# EAGLE board neojoint-splitter-30mm (EAGLE 6.6.0)
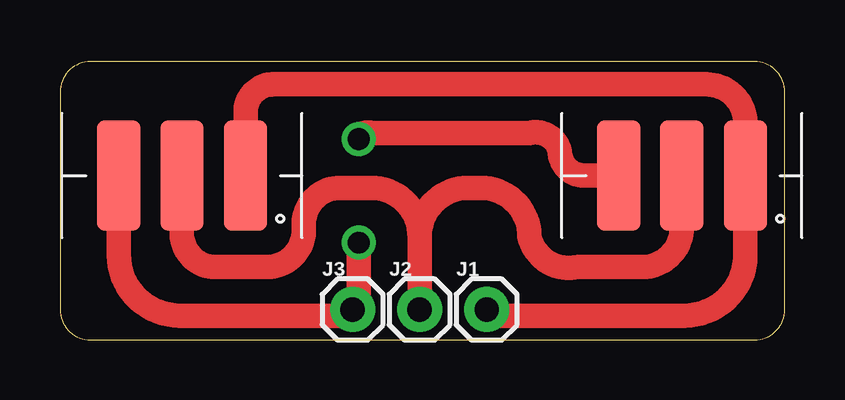
[diagram p0: board, top side]
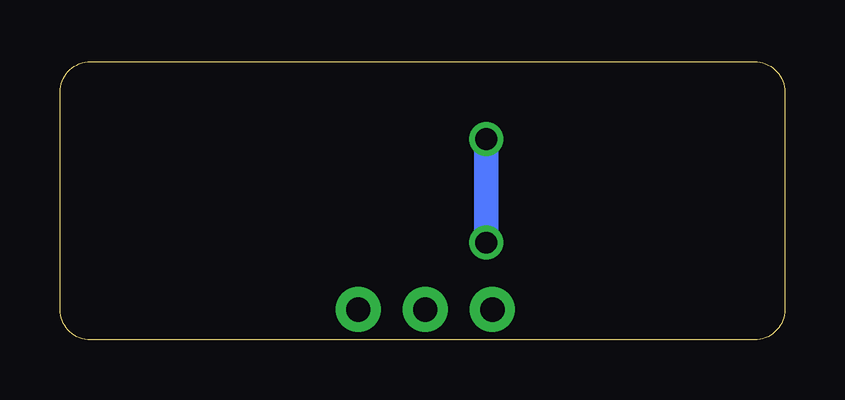
[diagram p1: board, bottom side, seen from below]

Size 30.21 x 11.61 mm. Coordinates in mm from the lower left corner, seen from the top.
Outline: 0,10.34 0,1.27 arc90 1.27,0 28.94,0 arc90 30.21,1.27 30.21,10.34 arc90 28.94,11.61 1.27,11.61 arc90 0,10.34
Copper layers (1*16): Top 0.035mm / dielectric 1.5mm / Bottom 0.035mm
Design rules "OthermillDRC_1_32_v2": minimum track width 8mil, minimum drill 0.8mm, track to track 0.794003125mm, track to pad 0.794003125mm, pad to pad 0.794003125mm, via to via 0.794003125mm, smd to smd 0mil, copper to edge 0mil, drill to drill 1mil, minimum pad ring 10mil, minimum via ring 10mil, stop-mask expansion 1mil, vias tented up to drill 30mil, thermal gap 10mil

## Footprints (pad centres in the part's own frame; a part is rotated, then mirrored left to right if it is on the bottom)
1X01 = drill 1.016 pad 1.88: 1 0,0
LEDSTRIP-3P = smd 4.6 x 1.8: A 0,-2.65; B 0,0; C 0,2.63

## Placement (x,y rotation side)
J1  [1X01]  17.78,1.27 0 top
J2  [1X01]  14.99,1.27 0 top
J3  [1X01]  12.19,1.27 0 top
U$1  LED_STRIP_3P  [LEDSTRIP-3P]  5.08,6.86 90 top
U$2  LED_STRIP_3P  [LEDSTRIP-3P]  25.91,6.86 90 top

## Library data of the parts
J1-J3 = SparkFun-Connectors
U$1 U$2 = NeoJoints

## Nets
N$1: J1.1 U$1.A U$2.A
N$2: J2.1 U$1.B U$2.B
N$3: J3.1 U$1.C U$2.C

## Tracks (layer width: path | path; a pad name or v marks a point on that pad's centre or on a via)
N$1
  Top 1.016: J1.1 arc90 17.78,1.02 25.65,1.02 26.02,1.02 arc90 28.56,3.56 U$2.A 28.56,9.03 arc90 26.92,10.67 26.16,10.67 25.78,10.67 17.78,10.67 10.16,10.67 9.53,10.67 8.89,10.67 arc90 7.73,9.51 U$1.A
N$2
  Top 1.016: U$1.B 5.08,5.33 5.08,5.08 5.08,4.32 arc90 6.6,3.05 8.64,3.05 arc90 10.16,4.57 10.16,4.83 arc-90 11.68,6.35 12.95,6.35 arc-90 14.99,4.32 | 14.99,4.06 14.99,4.32 | 14.99,4.32 14.99,4.06 | 14.99,4.06 14.99,3.81 | 14.99,3.81 J2.1 | 14.99,4.32 14.99,4.06 | U$2.B 25.91,4.57 arc-90 24.13,3.05 21.59,3.05 arc-90 19.56,4.32 arc90 17.53,6.35 17.02,6.35 arc90 14.99,4.32 | 14.99,4.32 14.99,3.81
N$3  (via drill 0.9)
  Top 1.016: 12.45,3.3 v12.45,4.06 12.45,3.3 | v12.45,8.38 arc-90 12.95,8.64 17.02,8.64 19.56,8.64 arc-90 20.83,7.87 arc90 21.84,6.86 U$2.C | U$1.C 2.45,3.56 arc90 4.99,1.02 5.33,1.02 11.83,1.02 arc45 J3.1 arc90 12.45,1.52 12.45,3.3
  Bottom 1.016: v12.45,8.38 v12.45,4.06